# Altium PCB Board_IV-11_Clock.PcbDoc
Units mm, origin at the board's own origin, x right, y up, seen from the top; angles counter-clockwise.
Board outline 137.6 x 59.83 mm, 2 copper layers (Top Layer, Bottom Layer); 58 components, 55 nets, 281 pads, 61 vias.
Unrouted connection lines stored in the file: 6.
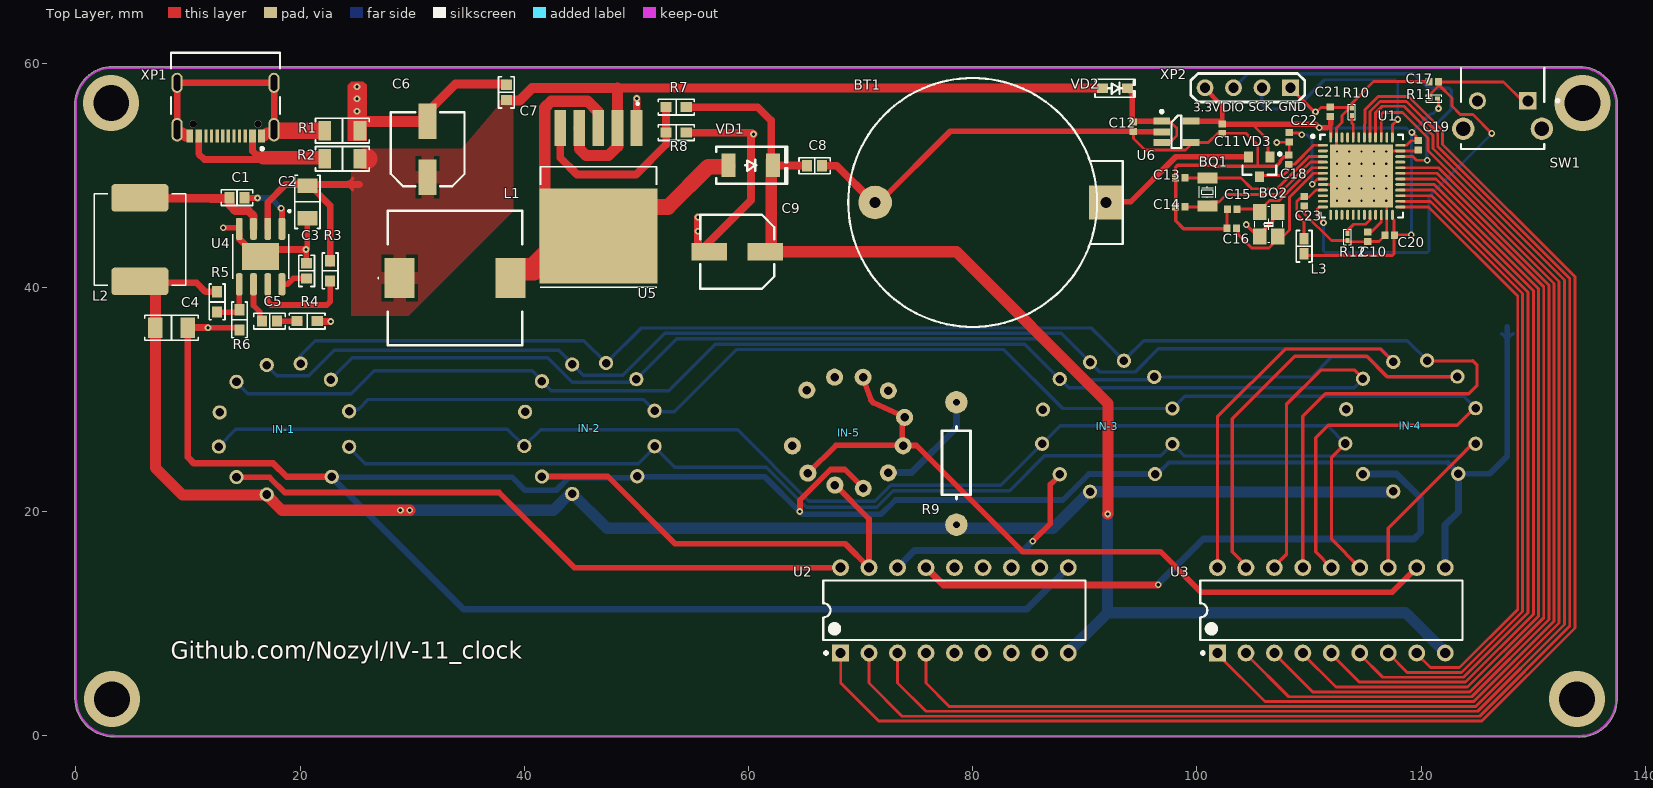
[diagram p0: Top Layer view]
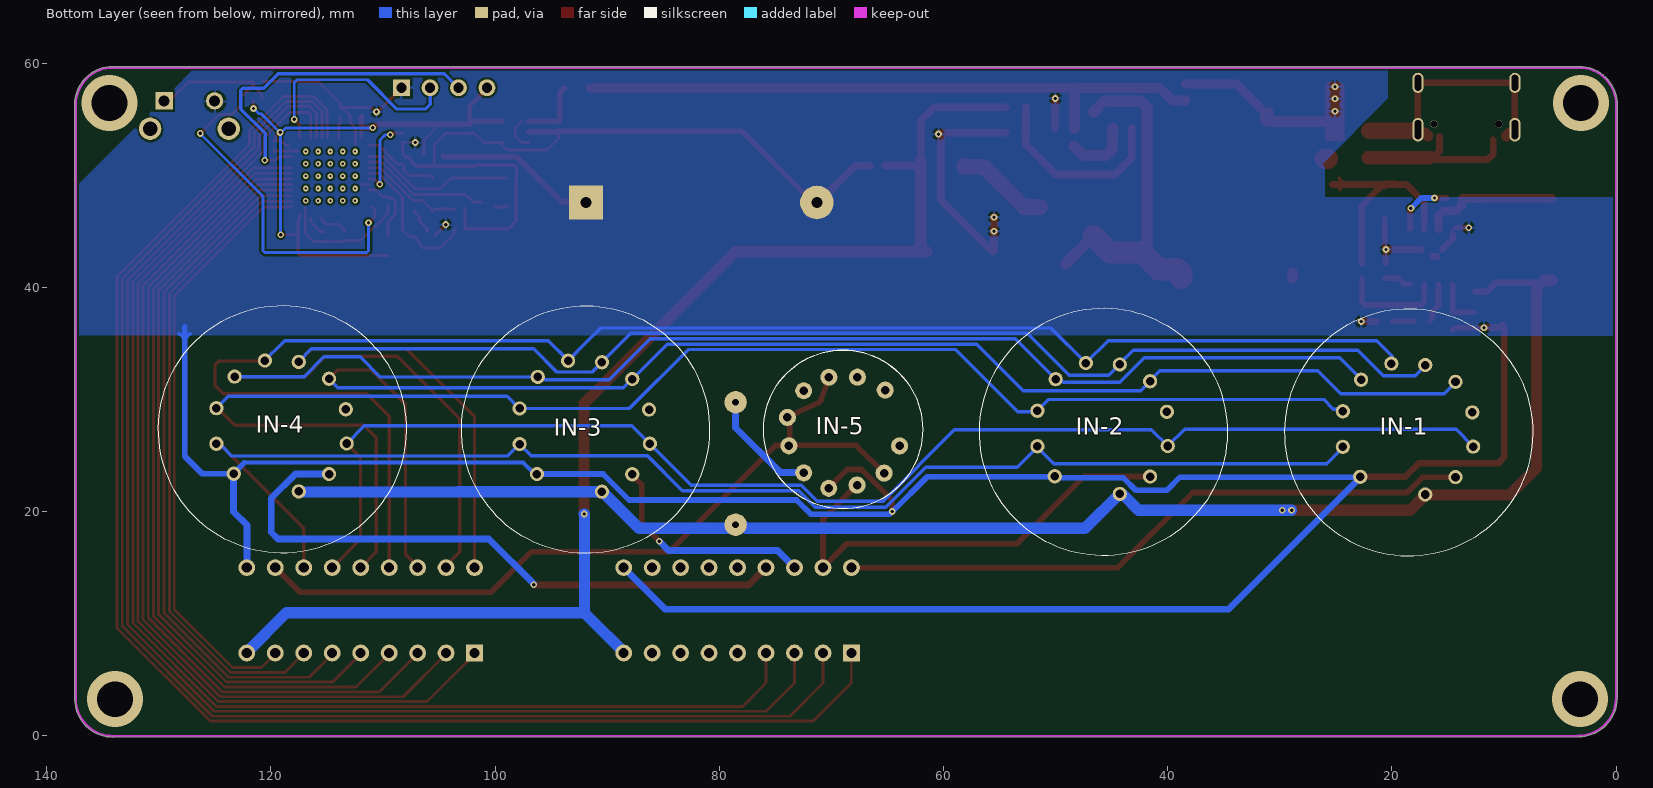
[diagram p1: Bottom Layer view, seen from below]
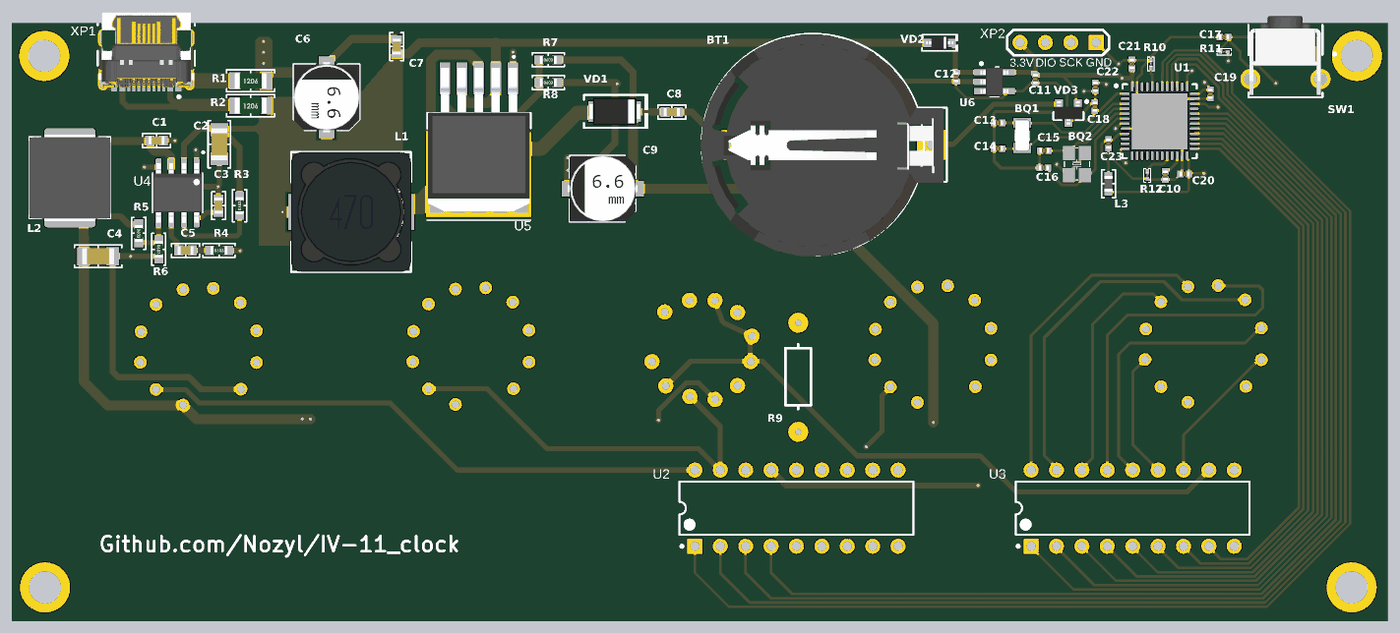
[diagram p2: 3D render of the assembled board from above, using the file's embedded part models]

## Layer stack, top to bottom
Top Solder: solder mask 0.0102, Solder Resist, Dk 3.5
Top Layer: signal copper 0.0356
Dielectric 1: dielectric 0.32, FR-4, Dk 4.8
Bottom Layer: signal copper 0.0356
Bottom Solder: solder mask 0.0102, Solder Resist, Dk 3.5

## Board outline
-0.088,3.309 -0.097,56.299 -0.1,56.325 cw(c3.28,56.318) -0.097,56.469 -0.094,56.524 cw(c3.282,56.318) 3.243,59.7 3.25,59.7 134.125,59.7 cw(c134.117,56.317) 137.5,56.325 137.5,56.316 137.5,3.258 137.5,3.193 cw(c134.118,3.257) 134.118,-0.125 134.085,-0.12 3.375,-0.1 3.327,-0.088 cw(c3.35,3.35)

## Design rules (kind name [scope] priority, off if disabled: settings)
Clearance Clearance_1 [All] p1: gap=0.18 ignorepadtopadclearanceinfootprint=FALSE except(0: Arc-Hole Track-Hole SMDPad-Hole THPad-Hole Via-Hole Fill-Hole Poly-Hole Region-Hole Text-Hole)
ComponentClearance [All] p1: gap=0.2 collisioncheckmode=3 verticalgap=0 showdistances=FALSE donotcheckwithout3dbody=TRUE
PolygonConnect PolygonConnect_2 [All vs IsNamedPolygon('GND_L02_P002')] p1: connectstyle=Relief reliefconductorwidth=0.254 reliefentries=4 polygonreliefangle="90 Angle" airgapwidth=0.254
PolygonConnect PolygonConnect_1 [All vs IsNamedPolygon('GND_L02_P002')] p2: thpad.connectstyle=NoConnect thpad.reliefconductorwidth=0.254 thpad.reliefentries=4 thpad.polygonreliefangle="90 Angle" thpad.airgapwidth=0.254 smdpad.connectstyle=Relief smdpad.reliefconductorwidth=0.254 smdpad.reliefentries=4 smdpad.polygonreliefangle="90 Angle" smdpad.airgapwidth=0.254 via.connectstyle=Relief via.reliefconductorwidth=0.254 via.reliefentries=4 via.polygonreliefangle="90 Angle" via.airgapwidth=0.254
PolygonConnect [All] p3: thpad.connectstyle=Relief thpad.reliefconductorwidth=0.254 thpad.reliefentries=4 thpad.polygonreliefangle="90 Angle" thpad.airgapwidth=0.254 smdpad.connectstyle=Relief smdpad.reliefconductorwidth=1.154 smdpad.reliefentries=4 smdpad.polygonreliefangle="90 Angle" smdpad.airgapwidth=0.254 via.connectstyle=Relief via.reliefconductorwidth=0.254 via.reliefentries=4 via.polygonreliefangle="90 Angle" via.airgapwidth=0.254
RoomDefinition Schemathic_IV-11_Clock [InComponentClass('Schemathic_IV-11_Clock')] p1: confinementstyle=ConfineIn formatcopy=TRUE lockcomponents=FALSE outline -4.95,-67.025 45.85,-67.025 45.85,-41.625 -4.95,-41.625
RoutingVias [All] p1 off: holewidth=0.711 width=1.27 viastyle="Through Hole" minholewidth=0.711 minwidth=1.27 maxholewidth=0.711 maxwidth=1.27
SolderMaskExpansion [All] p1: expansion=0.102 istentingtop=FALSE
Width [All] p1 off: maxlimit=0.254 minlimit=0.254 preferedwidth=0.254
29 further rules are at their usual default settings.

## Components (designator, comment, footprint, x,y, rotation, side; value= is the part's Value field where it differs from the comment)
BQ1 "32khz" KX-327NHT 100.946,48.5 r270 top
BQ2 "25Mhz" "4-SMD No lead" 106.425,45.631 r270 top
BT1 "CR2032" Battery_2032 80,47.575 r90 top value=3V
C1 "10nf" Cap_0603 14.375,48 r0 top
C2 "10uf" Cap_1206_3216 20.65,47.625 r270 top
C3 "100nf" Cap_0603 20.575,41.475 r270 top
C4 "10uf" Cap_1206_3216 8.525,36.4 r180 top
C5 "3.9nf" Cap_0603 17.276,36.991 r0 top
C6 "35v 220uf" "CAP 6.6MM H5.4MM" 31.375,52.325 r90 top
C7 "100nf" Cap_0603 38.4,57.4 r90 top
C8 "100nf" Cap_0603 65.9,50.85 r0 top
C9 "100uf" "CAP 6.6MM H5.4MM" 59,43.175 r180 top value="50v 100uf"
C10 "2.2uF" Cap_0402 115.25,44.5 r270 top
C11 "4.7uf" Cap_0402 102.247,54.159 r270 top
C12 "4.7uf" Cap_0402 94.322,54.334 r270 top
C13 "6pf" Cap_0402 98.525,49.75 r0 top
C14 "6pf" Cap_0402 98.525,47.175 r0 top
C15 "8pf" Cap_0402 103.156,46.975 r0 top
C16 "8pf" Cap_0402 103.1,45.245 r0 top
C17 "100nf" Cap_0402 121.138,58.334 r0 top
C18 "100nf" Cap_0402 108.2,51.4 r270 top
C19 "100nf" Cap_0402 119.75,52.675 r270 top
C20 "100nf" Cap_0402 117.2,44.65 r180 top
C21 "100nf" Cap_0402 111.9,55.654 r270 top
C22 "100nf" Cap_0402 108.25,53.375 r270 top
C23 "100nf" Cap_0402 109.571,47.675 r270 top
IN-1 "IV-11" PCBComponent_1#1 18.475,27.075 r0 top
IN-2 "IV-11" PCBComponent_1#1 45.725,27.125 r0 top
IN-3 "IV-11" PCBComponent_1#1 91.925,27.325 r0 top
IN-4 "IV-11" PCBComponent_1#1 118.975,27.35 r0 top
IN-5 "IV-6" PCBComponent_1#2 69,27.35 r0 top
L1 "470" CDRH127NP 33.822,40.834 r270 top
L2 "100" "3232_8.89 mm" 5.7,44.258 r0 top
L3 "10" "FER 0603" 109.575,43.666 r90 top
R1 "0" Res_1206 23.775,53.975 r0 top
R2 "0" Res_1206 23.775,51.475 r0 top
R3 "100k" RES_0603 22.68,41.471 r90 top value=100K
R4 "6.8k" RES_0603 20.626,36.991 r0 top value=6.8K
R5 "5.1k" RES_0603 12.591,38.7 r270 top value=6.2K
R6 "8.2k" RES_0603 14.591,37.099 r270 top value=8.2K
R7 "11k" RES_0603 53.55,56.075 r0 top value=11K
R8 "33" RES_0603 53.55,53.8 r0 top
R9 "10" DIP 78.55,29.75 r270 top
R10 "10k" Res_0201 113.825,55.654 r270 top
R11 "10k" Res_0201 121.147,56.859 r0 top
R12 "10k" Res_0201 113.45,44.5 r270 top
SW1 "Switch Right Angle" "Button Right Angle" 127.247,56.509 r0 top value=TS-A3PS-130
U1 "STM32F401" STM-UFQFPN48_N 114.7,49.925 r0 top
U2 "TD62783APG" ALEG-DIP-18 78.375,11.19 r90 top
U3 "TD62783APG" ALEG-DIP-18 112,11.19 r90 top
U4 "MP2307DN" SOIC127P600X170-9N 16.475,42.75 r270 top
U5 "XL6009" DPAK170P1435X465-6N 46.605,48.075 r270 top
U6 "XC6219B332MR" SOT-23-5 98.175,53.875 r0 top value=LD2980ABM33TR
VD1 "SS34" SMA_DO214AC 60.2,50.9 r0 top value=10BQ100
VD2 "BAS321" SOD323 92.7,57.77 r0 top value=10BQ100
VD3 "BAT54C" SOT-23-3 105.575,50.75 r270 top
XP1 "USB TYPE_C" FP-USB4105-GF-A-MFG 13.347,57.084 r180 top
XP2 "PLS-4" PLS-4 108.352,57.809 r180 top

## Footprints (in the part's own frame and the unit in brackets; to place one, negate y for a bottom-side part, rotate by r counter-clockwise, add the part's x,y. Pads: shape width x height; smd on the part's side, far side on the other; paste and mask are expansions set on the pad)
"4-SMD No lead" [mm] "SMD Low-Freq Crystal"
  rect 1.4x1.2 smd mask+0.05: 1(-1.1,-0.8) 2(1.1,-0.8) 3(1.1,0.8) 4(-1.1,0.8)
  silkscreen extent -1.6,-1.25 1.6,1.25
"3232_8.89 mm" [mm]
  rrect25% 5.09x2.46 smd paste+0 mask+0.102: 1(0,3.725) 2(0,-3.725)
  silkscreen extent -4.09,-4.09 4.09,4.09, body extent -4.09,-4.32 4.09,4.32, height 4.01
ALEG-DIP-18 [mm] "DIP, 8-Leads, Body 23.35x7.1mm, Pitch 2.54mm"
  rect 1.5x1.5 hole 0.9: 1(-3.81,10.16)
  round 1.5 hole 0.9: 2(-3.81,7.62) 3(-3.81,5.08) 4(-3.81,2.54) 5(-3.81,0) 6(-3.81,-2.54) 7(-3.81,-5.08) 8(-3.81,-7.62) 9(-3.81,-10.16) 10(3.81,-10.16) 11(3.81,-7.62) 12(3.81,-5.08) 13(3.81,-2.54) 14(3.81,0) 15(3.81,2.54) 16(3.81,5.08) 17(3.81,7.62) 18(3.81,10.16)
  silkscreen extent -3.93,-11.7 2.65,11.7, body extent -3.95,-11.67 3.95,11.67, height 5.33
Battery_2032 [mm]
  rect 3x3 hole 1: 1(0,-11.9)
  round 3 hole 1: 2(0,8.7)
  silkscreen extent -11.1,-13.4 11.1,11.1, body extent -11.22,-13.09 11.08,11.21, height 8.5
"Button Right Angle" [mm]
  rect 1.54x1.54 hole 0.99 paste-1000 mask+0: 1(2.283,0.134)
  round 2 hole 1.3 paste-1000 mask+0: 2(3.538,-2.356) 4(-3.472,-2.356)
  round 1.54 hole 0.99 paste-1000 mask+0: 3(-2.217,0.134)
  silkscreen extent -3.67,-4.18 5.06,3.05, body extent -4.6,-4.33 4.6,4.34, height 0.25
"CAP 6.6MM H5.4MM" [mm] "Aluminum Electrolytic Capacitor, Body 6.60x6.60x5.40mm, IPC Low Density"
  rect 3.2x1.6 smd: 1(-2.5,0) 2(2.5,0)
  silkscreen extent -3.3,-3.3 3.3,3.3, body extent -3.5,-3.3 3.5,3.3, height 5.4
Cap_0402 [mm]
  rect 0.62x0.67 smd: 1(-0.425,0.012) 2(0.425,0.012)
  body extent -0.5,-0.24 0.5,0.26, height 0.56
Cap_0603 [mm]
  rect 0.9x1 smd: 1(-0.675,0) 2(0.675,0)
  silkscreen extent -1.4,-0.7 1.4,0.7, body extent -0.8,-0.41 0.8,0.41, height 0.82
Cap_1206_3216 [mm]
  rect 1.3x1.8 smd: 1(-1.45,0) 2(1.45,0)
  silkscreen extent -2.37,-1.12 2.37,1.12, body extent -1.6,-0.81 1.6,0.81, height 1.62
CDRH127NP [mm]
  rect 3.6x2.7 smd: 1(0,-4.95) 2(0,4.95)
  silkscreen extent -6,-6.9 6,6, body extent -6,-5.99 6,6.01, height 7.42
DIP [mm]
  round 2 hole 0.6: 1(0,0) 2(10.922,0)
  silkscreen extent 2.16,-1.27 8.64,1.27, body extent 0.4,-1.1 10.4,1.12, height 2.6
DPAK170P1435X465-6N [mm]
  rect 3.21x1.05 smd: 1(-6.13,3.4) 2(-6.13,1.7) 3(-6.13,0) 4(-6.13,-1.7) 5(-6.13,-3.4)
  rect 8.46x10.53 smd paste-6: 6(3.5,0)
  silkscreen extent -8.4,-5.18 8.05,5.18, body extent -7.18,-5.08 7.18,5.08, height 4.65
"FER 0603" [mm] "Chip Ferrite, 2-Leads, Body 1.60x0.80mm, IPC Medium Density"
  rect 1x0.8 smd: 1(-0.675,0) 2(0.675,0)
  silkscreen extent -1.4,-0.7 1.4,0.7, body extent -0.8,-0.41 0.8,0.41, height 0.82
FP-USB4105-GF-A-MFG [mm]
  rrect100% 1x2.1 hole 1.7 slot 0.6 at 0 deg paste-1000 mask+0: 1(-4.32,3.015) 2(4.32,3.015)
  rrect100% 1x1.8 hole 1.4 slot 0.6 at 0 deg paste-1000 mask+0: 3(-4.32,-1.165) 4(4.32,-1.165)
  rect 0.6x1.15 smd paste+0 mask+0: A1-B12(-3.2,3.59) A4-B9(-2.4,3.59) B1-A12(3.2,3.59) B4-A9(2.4,3.59)
  rect 0.3x1.15 smd paste+0 mask+0: A5(-1.25,3.59) A6(-0.25,3.59) A7(0.25,3.59) A8(1.25,3.59) B5(1.75,3.59) B6(0.75,3.59) B7(-0.75,3.59) B8(-1.75,3.59)
  round 0.65 hole 0.65 unplated paste-1000 mask+0: ""(-2.89,2.515) ""(2.89,2.515)
  silkscreen extent -4.86,-3.84 4.86,4.84, body extent -4.96,-3.94 4.96,4.27, height 0.25
KX-327NHT [mm] "SMD Low-Freq Crystal"
  rect 1x1.8 smd mask+0.1: 1(-1.25,0) 2(1.25,0)
  silkscreen extent -0.5,-0.75 0.5,0.75, body extent -1.6,-0.75 1.6,0.75, height 0.71
PCBComponent_1#1 [mil]
  round 50 hole 30: 1(-57.21,-218.62) 2(-163.51,-157.6) 3(-225.52,-50.31) 4(-222.57,69.77) 5(-163.51,177.05) 6(-57.21,236.1) 7(61.83,241.07) 8(168.18,184.53) 9(232.16,73.7) 10(232.16,-51.3) 11(171.13,-156.61)
PCBComponent_1#2 [mil]
  round 60 hole 30: 1(-149.54,137.06) 2(-52.1,182.53) 3(48.26,182.33) 4(136.77,134.86) 5(194.13,41.28) 6(188.85,-58.41) 7(136.71,-153.37) 8(48.68,-207.67) 9(-50.57,-196.41) 10(-145.77,-154.35) 11(-199.91,-58.88)
PLS-4 [mm]
  rect 1.5x1.5 hole 0.9: 1(0,0)
  round 1.5 hole 0.9: 2(2.54,0) 3(5.08,0) 4(7.62,0)
  silkscreen extent -1.27,-1.27 8.89,1.27, body extent -1.12,-1.12 8.74,1.12, height 8.5
Res_0201 [mm]
  rect 0.44x0.35 smd: 1(-0.325,0) 2(0.325,0)
  silkscreen extent -0.7,-0.33 0.7,0.33, body extent -0.3,-0.15 0.3,0.15, height 0.21
RES_0603 [mm] "Chip Resistor, 2-Leads, Body 1.60x0.80mm, IPC Medium Density"
  rect 1x0.9 smd: 1(-0.9,0) 2(0.9,0)
  silkscreen extent -1.6,-0.7 1.6,0.7, body extent -0.85,-0.4 0.85,0.4, height 0.45
Res_1206 [mm]
  rect 1.15x1.7 smd: 1(-1.575,0) 2(1.575,0)
  silkscreen extent -2.4,-1.1 2.4,1.1, body extent -1.6,-0.78 1.6,0.77, height 0.55
SMA_DO214AC [mm] "Molded Diode, 2-Leads, Body 4.30x2.60mm, IPC Medium Density"
  rect 1.27x2.1 smd: 1(-1.985,0) 2(1.985,0)
  silkscreen extent -3.08,-1.65 3.25,1.65, body extent -2.6,-1.37 2.6,1.37, height 2.4
SOD323 [mm] "SOD, 2-Leads, Body 1.25x2.50mm, IPC Medium Density"
  rect 1x0.83 smd: 1(-1.112,0) 2(1.112,0)
  silkscreen extent -1.78,-0.8 1.78,0.8, body extent -1.36,-0.62 1.36,0.62, height 1.05
SOIC127P600X170-9N [mm]
  rrect50% 1.97x0.6 smd: 1(-2.475,1.905) 2(-2.475,0.635) 3(-2.475,-0.635) 4(-2.475,-1.905) 5(2.475,-1.905) 6(2.475,-0.635) 7(2.475,0.635) 8(2.475,1.905)
  rect 2.41x3.3 smd paste-3: 9(0,0)
  silkscreen extent -4.16,-2.5 2,2.67, body extent -3,-2.45 3,2.45, height 1.7
SOT-23-3 [mm] "SOT23, 3-Leads, Body 2.90x2.40mm, Pitch 0.95mm, IPC Medium Density"
  rect 0.972x0.802 smd: 1(-0.885,0.95) 2(-0.885,-0.95) 3(0.885,0)
  silkscreen extent -1.27,-1.5 0.7,1.95, body extent -1.16,-1.45 1.16,1.45, height 1
SOT-23-5 [mm] "SOT23, 5-Leads, Body 2.90x2.80mm, Pitch 0.95mm, IPC Medium Density"
  rect 1.5x0.62 smd: 1(-1.31,0.95) 2(-1.31,0) 3(-1.31,-0.95) 4(1.31,-0.95) 5(1.31,0.95)
  silkscreen extent -1.43,-1.45 0.43,1.93, body extent -1.4,-1.45 1.4,1.45, height 1
STM-UFQFPN48_N [mm] "QFN, 48-Leads, Body 7.1x7.1mm, Pitch 0.5mm, Thermal Pad 5.6x5.6mm, IPC Medium Density"
  oval 0.9x0.25 smd: 1(-3.45,2.75) 2(-3.45,2.25) 3(-3.45,1.75) 4(-3.45,1.25) 5(-3.45,0.75) 6(-3.45,0.25) 7(-3.45,-0.25) 8(-3.45,-0.75) 9(-3.45,-1.25) 10(-3.45,-1.75) 11(-3.45,-2.25) 12(-3.45,-2.75) 25(3.45,-2.75) 26(3.45,-2.25) 27(3.45,-1.75) 28(3.45,-1.25) 29(3.45,-0.75) 30(3.45,-0.25) 31(3.45,0.25) 32(3.45,0.75) 33(3.45,1.25) 34(3.45,1.75) 35(3.45,2.25) 36(3.45,2.75)
  oval 0.25x0.9 smd: 13(-2.75,-3.45) 14(-2.25,-3.45) 15(-1.75,-3.45) 16(-1.25,-3.45) 17(-0.75,-3.45) 18(-0.25,-3.45) 19(0.25,-3.45) 20(0.75,-3.45) 21(1.25,-3.45) 22(1.75,-3.45) 23(2.25,-3.45) 24(2.75,-3.45) 37(2.75,3.45) 38(2.25,3.45) 39(1.75,3.45) 40(1.25,3.45) 41(0.75,3.45) 42(0.25,3.45) 43(-0.25,3.45) 44(-0.75,3.45) 45(-1.25,3.45) 46(-1.75,3.45) 47(-2.25,3.45) 48(-2.75,3.45)
  rect 5.6x5.6 smd paste+0 mask+0.102: 49(0,0)
  silkscreen extent -4.47,-3.7 3.7,3.7, body extent -3.55,-3.55 3.55,3.55, height 0.6

## Part data
BQ1: library part XTAL-2Pin, "Часовой кварц", Package=DIP
BQ2: library part XTAL-4Pin_1, "Кварцевый резонатор", Package=DIP
BT1: library part Battery_2Pin, "Держатель  для CR2032", Name="держатель для CR2032"
C1 C2 C3 C4 C5 C7 C8 C10 C11 C12 C13 C14 C15 C16 C17 C18 C19 C20 C21 C22 C23: library part Capacitor, "Конденсатор", Package=0805
C6 C9: library part Capacitor_Polar, "Конденсатор эл-лит", Package=DIP
IN-1 IN-2 IN-3 IN-4: "Вакуумный индикатор"
IN-5: library part IV-11, "Вакуумный индикатор"
L1 L2 L3: library part Drossel, "Дроссель"
R1 R2 R3 R4 R5 R6 R7 R8 R9 R10 R11 R12: library part Resistor, "Резистор", Package=0805
SW1: library part Button, "Кнопка", Packege=DIP
U1: library part CMP-0243-00119-2, "ARM Cortex-M4 32-bit MCU+FPU, 105 DMIPS, 256 kB Flash, 64 kB Internal RAM, 36 I/Os, 48-pin UFQFPN, -40 to 85 degC, Tray", I/Os (High Current)=36, Manufacturer=STMicroelectronics, Operating Frequency(F) (Processor speed) (MHz)=84, PartNumber=STM32F401CCU6, Supply Voltage(Vcc) max (V)=3.6, Supply Voltage(Vcc) min (V)=1.8, ComponentLink1Description="Manufacturer URL", ComponentLink1URL=http://www.st.com/web/en/home.html, ComponentLink2Description=Datasheet, ComponentLink2URL=http://www.st.com/st-web-ui/static/active/en/resource/technical/document/data_brief/DM00071938.pdf, ComponentLink3Description="Package Specification", ComponentLink3URL=http://www.st.com/st-web-ui/static/active/en/resource/technical/document/data_brief/DM00071938.pdf, Core="ARM Cortex-M4", DatasheetVersion="Rev. 1", FLASH Size (Prog) (kB)=256, Internal RAM Size (kB)=64, Mounting Technology="Surface Mount", PackageDescription="48-Pin Ultra Thin Fine Pitch Quad Flat No-Lead, 7 x 7 x 0.6 mm Body, 0.5 mm Pitch, Exposed Pad", PackageReference=UFQFPN48, PackageVersion="Rev. 1, 04/2013", Packing=Tray
U2 U3: library part CMP-2000-07346-1, "8-Channel Source Driver, 15 V Input, -20 to 85 degC, 18-Pin DIP, RoHS, Tube", Current - Output / Channel=120mA, Current - Peak Output=500mA, Manufacturer="Allegro Microsystems", On-State Resistance=-, Operating Temperature=-20°C~85°C, Package / Case="18-DIP(0.300\",7.62mm)", Package Description="18-Pin Double In-line Package, Body 22.86 x 6.605 mm, Pitch 2.54 mm", Package Reference=DIP-18, Standard Package=21, Supplier Device Package=18-DIP, Voltage - Supply=25V, Category=IntegratedCircuits(ICs), Datasheet URL=https://datasheet.ciiva.com/19456/1762681-19456617.pdf, Family=PMIC-MOSFET,BridgeDrivers-InternalSwitch, Input Type=Non-Inverting, Manufacturer URL=http://www.allegromicro.com/, Mounting Technology=ThroughHole, Mounting Type=ThroughHole, Number of Outputs=8, Other Names=620-1120, Packaging=Tube, Product Change Notification=UDN298xAx-TLTBNotice30/Apr/2012, Series=-, Type=HighSide
U4: library part MP2307DN-LF-Z, "Buck Switching Regulator IC Positive Adjustable 0.925V 1 Output 3A 8-SOIC (0.154, 3.90mm Width) Exposed Pad", Package="SOIC-8 Monolithic Power", Availability="In Stock", Check_prices=https://www.snapeda.com/parts/MP2307DN-LF-Z/Monolithic+Power+Systems+Inc./view-part/?ref=eda, MF="Monolithic Power", MP=MP2307DN-LF-Z, Price=None, Purchase-URL=https://pricing.snapeda.com/search/part/MP2307DN-LF-Z/?ref=eda, SnapEDA_Link=https://www.snapeda.com/parts/MP2307DN-LF-Z/Monolithic+Power+Systems+Inc./view-part/?ref=snap
U5: "The XL6009 regulator is a wide input range, current mode, DC/DC converter which is capable of generating either positive or negative output voltages.", Package="TO-263-5L XLSEMI", Availability="Not in stock", Check_prices=https://www.snapeda.com/parts/XL6009/XLSEMI/view-part/?ref=eda, MF=XLSEMI, MP=XL6009, Price=None, SnapEDA_Link=https://www.snapeda.com/parts/XL6009/XLSEMI/view-part/?ref=snap
U6: library part LD2980ABM33TR, "LDO", Package=T05A, Name=XC6219B332MR
VD1 VD2: library part "Diode Shotki", "Диод Шотки"
VD3: library part Diode_Double, "Диод", Name=BAT54C
XP1: library part CMP-245163-000001-1, "CONN RCPT USB2.0 TYPEC 5A", Current Rating=5/6.25/1.25/0.25A, Manufacturer=GCT, Manufacturer Part Number=USB4105-GF-A, Package=0, Temperature="-40°C to +85°C", Temperature Range High=+85°C, Temperature Range Low=-40°C, Voltage Rating=20V, Automotive=No, Category=Conn, ComponentLink2Description=Datasheet, ComponentLink2URL=https://gct.co/files/drawings/usb4105.pdf, Conn Orientation="Right Angle", Contact Material=Gold,Nickel, Device Class L1=Connectors, Device Class L2="USB Connectors", Device Class L3=unset, Digikey Description="CONN RCPT USB2.0 TYPEC 5A", Height=3.46mm, Is Female=yes, Lead Free=Yes, Number Of Contacts=16, Octopart=https://octopart.com/usb4105-gf-a-gct-106627878, RoHS=TRUE, Usb Standard="USB 2.0"
XP2: library part XP4, "Connector"

## Free pads (board coordinates)
  round 1.524 hole 3.2: 12(3.15,56.45) 12(3.231,3.255) 12(133.906,3.255) 12(134.431,56.455)

## Via types
v1: diameter 0.6, hole 0.3, Top Layer to Bottom Layer, tented both sides, 32 vias
v2: diameter 0.5, hole 0.2, Top Layer to Bottom Layer, 25 vias
v3: diameter 5, hole 3.2, Top Layer to Bottom Layer, 4 vias

## Nets (pads, with @x,y where several pads share a name; then routed paths per layer and width w, separated by ;. In a path a pad name is that pad's centre, name@x,y a point inside that pad or via, vN(x,y) a via of type N, cw(c..) or ccw(c..) an arc to the next point about the centre after c; other vN are vias at no path point)
1.5V: C4.2 IN-1.1 IN-2.1 IN-3.1 IN-4.1 L2.2 R5.1 R9.2 | length 141.2
  Top Layer w0.6: L2.2@7.09,40.4 10.775,40.4 11.575,39.6 R5.1
  Top Layer w1: L2.2@5.7,40.639 6.383,40.639 7.09,39.932 7.09,38.382 7.097,38.375 7.097,37.689 ; 7.097,37.682 7.097,36.482 7.097,23.878 9.5,21.475 17.025,21.475 18.391,20.109 v1(28.947,20.109) v1(29.772,20.109)
  Bottom Layer w0.3: R9.2@77.6,18.846 ccw(c77.565,19.552) R9.2@78.204,19.248 ; R9.2@78.871,19.475 ccw(c79.577,19.51) R9.2@79.273,18.871
  Bottom Layer w1: v1(28.947,20.109) v1(29.772,20.109) 42.584,20.109 43.997,21.522 44.219,21.522 IN-2.1@44.271,21.574 ; IN-2.1@44.3,21.575 47.366,18.509 72.534,18.509 72.55,18.525 72.566,18.509 77.6,18.509 77.728,18.637 78.359,18.637 R9.2 ; R9.2@78.549,18.509 79.273,18.509 87.159,18.509 90.418,21.768 90.486,21.768 103.289,21.768 103.307,21.75 IN-4.1@117.475,21.75
3.3V: C11.1 C19.1 C20.1 C21.2 L3.1 R11.2 U1.24 U1.36 U1.48 U6.5 VD3.1 XP2.4 | length 59.1
  Top Layer w0.254: 105,54.5 106.35,53.15 106.35,51.925 VD3.1@106.525,51.75 ; L3.1@109.575,42.84 117.451,42.84 117.6,42.989 C20.1@117.6,44.65 ; 111.601,54.229 111.95,54.579 ; U1.24 117.45,46.154 117.6,46.004 C20.1@117.6,44.65 ; U1.36@118.473,52.677 118.702,52.677 119.1,53.075 119.738,53.075 119.554,53.258 119.554,53.501 119.233,53.823 v1(119.187,53.823) ; v1(119.125,44.7) 117.65,44.7 C20.1@117.6,44.65 ; v1(121.559,55.952) 121.559,56.655
  Top Layer w0.3: C11.1@102.247,54.559 C11.1@102.272,54.584 ; U1.48 111.95,54.579
  Top Layer w0.4: XP2.4@100.697,57.759 102.272,56.184 C11.1@102.272,54.584
  Top Layer w0.5: U6.5@99.35,54.825 101.941,54.825 102.196,54.569 102.237,54.569 C11.1@102.237,54.549 ; C11.1@102.247,54.559 102.256,54.55 105,54.55 106.675,54.55 ; 106.737,54.55 110.582,54.55 110.903,54.229 v1(110.925,54.229) 111.601,54.229 ; C21.2 111.95,55.192 111.95,54.579
  Bottom Layer w0.254: v1(110.925,54.229) 118.687,54.229 v1@119.094,53.823 ; v1(119.125,44.7) 119.156,44.731 119.156,53.792 v1@119.125,53.823 ; v1(119.187,53.823) 119.209,53.823 120.871,55.486 121.062,55.486 121.528,55.952 v1(121.559,55.952)
5V: C2.1 C6.1 C7.1 L1.1 R2.2 R3.2 U4.2 U5.2 U5.4 VD2.1 | length 84.3
  Top Layer w0.3: 24.025,49.046 cw(c24.081,48.341) 24.675,48.725 ; 24.097,49.322 ccw(c24.061,50.029) 24.7,49.725
  Top Layer w0.6: U4.2 17.11,47.585 18.7,49.175 C2.1@19.775,49.175 ; C2.1 20.758,49.183 24.081,49.183 25.3,49.183 ; C2.1@20.9,49.075 22.675,47.3 R3.2@22.675,42.125
  Top Layer w0.7: C2.1@19.775,49.2 20.525,49.2 C2.1
  Top Layer w0.8: 48.45,57.781 91.207,57.781 91.223,57.765 VD2.1@91.556,57.765
  Top Layer w0.9: C7.1@38.4,56.675 39.6,56.675 40.706,57.781 48.305,57.781 48.45,57.781
  Top Layer w1: L1.1 L1.1@28.872,41.284 ; U5.4 44.93,54.18 44.93,52.345 45.516,51.759 47.447,51.759 ; 47.508,51.759 48.348,52.599 ; U5.2 48.305,57.781
  Top Layer w1.8: R2.2@25.7,51.475 26,51.475
45V: C8.1 C9.1 R7.2 U2.9 U3.9 VD1.2 | length 115.4
  Top Layer w0: VD1.2@62.065,51.3 62.181,51.184 VD1.2@62.181,50.894
  Top Layer w0.7: R7.2@54.4,56.075 60.825,56.075 62.025,54.875 62.025,51.34 VD1.2@62.04,51.325 ; VD1.2@62.065,51.3 62.065,51.236 62.466,50.834 62.466,50.872 65.203,50.872 C8.1
  Top Layer w1: C9.1 62.173,43.175 C9.1@62.349,43.351 ; VD1.2@62.04,51.325 62.025,51.31 62.025,50.834 62.025,43.675 C9.1@62.349,43.351 ; v1(92.05,19.775) 92.075,19.8 92.075,29.65 78.55,43.175 62.55,43.175 62.441,43.286 62.363,43.365 C9.1@62.349,43.351
  Bottom Layer w1: U2.9@88.475,7.4 91.625,10.55 92.024,10.949 ; v1(92.05,19.775) 92.024,19.749 92.024,10.949 ; U3.9@122.175,7.4 118.6,10.975 92.024,10.975 92.024,10.949
A: IN-1.6 IN-2.6 IN-3.6 IN-4.6 U3.18 | length 139.4
  Top Layer w0.3: U3.18 101.84,28.465 107.875,34.5 116.4,34.5 IN-4.6@117.6,33.3
  Bottom Layer w0.3: IN-1.6@16.965,33.085 17.925,32.125 20.775,32.125 23.047,34.397 43.078,34.397 IN-2.6@44.311,33.164 ; IN-2.6@44.271,33.124 45.245,32.15 48.775,32.15 52.52,35.895 87.905,35.895 90.484,33.316 91.35,32.45 94.487,32.45 96.547,34.509 116.391,34.509 IN-4.6@117.525,33.375
B: IN-1.5 IN-2.5 IN-3.5 IN-4.5 U3.16 | length 130
  Top Layer w0.3: U3.16 106.92,15.121 108,16.201 108,29.575 111.05,32.625 114.075,32.625 IN-4.5@114.85,31.85
  Bottom Layer w0.3: IN-1.5@14.275,31.575 15.325,30.525 24.575,30.525 26.597,32.547 40.728,32.547 IN-2.5@41.611,31.664 ; IN-2.5@41.571,31.624 42.42,30.775 52.887,30.775 57.047,34.935 84.646,34.935 87.781,31.8 87.804,31.8 88.561,31.044 114.037,31.044 IN-4.5@115.036,32.042
BUT: C17.2 R11.1 SW1.1 U1.12 | length 43.5
  Top Layer w0.254: U1.12@110.927,47.175 110.899,47.175 110.75,47.026 110.75,46.275 v1@111.275,45.75 ; R11.1@120.747,56.861 120.843,56.957 120.843,57.243 121.563,57.963 C17.2 ; C17.2@121.625,58.025 122.75,56.9 122.75,56.175 123.5,55.425 124.625,55.425 v1@126.316,53.734 ; C17.2@121.722,58.334 127.372,58.334 SW1.1@129.147,56.559 ; v1(126.322,53.734) v1@126.316,53.734 ; v1@126.325,53.725 v1@126.316,53.734
  Bottom Layer w0.254: v1(111.297,45.759) 111.297,43.258 111.445,43.109 120.573,43.109 120.722,43.258 120.722,48.134 v1(126.322,53.734)
C: IN-1.3 IN-2.3 IN-3.3 IN-4.3 U3.13 | length 121.1
  Top Layer w0.3: IN-4.3@113.225,26.05 112.02,24.845 112.02,17.52 U3.13
  Bottom Layer w0.3: IN-1.3@12.721,25.799 14.272,27.35 38.495,27.35 39.996,25.849 41.447,27.3 59.025,27.3 65.391,20.934 71.277,20.934 72.677,22.334 82.502,22.334 86.211,26.043 87.817,27.65 111.679,27.65 IN-4.3@113.261,26.069
CATH1: U1.32 U3.1 | length 82.9
  Top Layer w0.254: U3.1@101.825,7.3 106.08,3.045 124.701,3.045 131.875,10.219 131.875,40.353 121.553,50.675 U1.32
CATH2: U1.31 U3.2 | length 78.7
  Top Layer w0.254: U3.2@104.375,7.3 108.196,3.479 124.521,3.479 131.425,10.383 131.425,40.189 121.439,50.175 U1.31
CATH3: U1.30 U3.3 | length 74.5
  Top Layer w0.254: U3.3@106.95,7.3 110.337,3.913 124.342,3.913 130.948,10.52 130.948,40.052 121.325,49.675 U1.30
CATH4: U1.29 U3.4 | length 70.3
  Top Layer w0.254: U3.4@109.45,7.3 112.403,4.347 124.162,4.347 130.475,10.66 130.475,39.875 121.175,49.175 U1.29
CATH5: U1.28 U3.5 | length 66
  Top Layer w0.254: U3.5@112,7.275 114.494,4.781 123.982,4.781 130.041,10.84 130.041,39.695 121.061,48.675 U1.28
CATH6: U1.27 U3.6 | length 61.9
  Top Layer w0.254: U3.6@114.5,7.3 116.585,5.215 123.802,5.215 129.555,10.967 129.555,39.568 120.947,48.175 U1.27
CATH7: U1.26 U3.7 | length 57.6
  Top Layer w0.254: U3.7@117.1,7.325 118.776,5.649 123.623,5.649 129.06,11.086 129.06,39.449 120.836,47.673 U1.26 U1.26
CATH8: U1.25 U3.8 | length 53.4
  Top Layer w0.254: U1.25 120.675,47.175 128.626,39.224 128.626,11.266 123.443,6.083 120.842,6.083 U3.8@119.625,7.3
D: IN-1.10 IN-2.10 IN-3.10 IN-4.10 U3.12 | length 121.7
  Top Layer w0.3: U3.12 117.08,18.5 124.623,26.044 IN-4.10@124.886,26.044
  Bottom Layer w0.3: IN-1.10@24.325,25.75 25.8,24.275 50.175,24.275 IN-2.10@51.625,25.725 ; IN-2.10@51.625,25.75 53.425,23.95 61.603,23.95 65.169,20.384 71.434,20.384 72.904,21.854 83.288,21.854 86.409,24.975 96.792,24.975 IN-3.10@97.836,26.019 ; IN-3.10@97.8,25.95 97.904,25.95 98.904,24.95 123.5,24.95 124.272,25.722 124.302,25.722 124.623,26.044 IN-4.10@124.886,26.044
DP: IN-5.3 IN-5.5 IN-5.6 IN-5.10 U3.11 | length 69.7
  Top Layer w0.5: IN-5.10@65.372,23.484 67.797,25.909 IN-5.6@73.797,25.909 ; IN-5.3@70.222,31.909 70.934,29.971 70.972,29.868 71.05,29.79 71.113,29.727 IN-5.5@73.926,28.427 ; IN-5.5@73.912,28.397 73.912,28.103 73.725,27.916 73.725,26.339 73.835,26.23 73.855,26.23 73.855,26.031 73.809,25.931 73.792,25.894 74.981,25.894 84.45,16.425 96.75,16.425 100.375,12.8 117.42,12.8 U3.11
E: IN-1.9 IN-2.9 IN-3.9 IN-4.9 U3.14 | length 134.7
  Top Layer w0.3: U3.14 110.6,16.4 110.6,26.575 111.725,27.7 123.25,27.7 IN-4.9@124.888,29.338
  Bottom Layer w0.3: IN-1.9@24.325,28.95 24.511,29.136 25.223,29.136 26.087,30 50.625,30 51.725,28.9 53.362,28.9 58.917,34.455 82.776,34.455 88.038,29.194 97.836,29.194 98.942,30.3 123.8,30.3 IN-4.9@125.055,29.045
F: IN-1.8 IN-2.8 IN-3.8 IN-4.8 U3.17 | length 143.9
  Top Layer w0.3: U3.17 104.38,15.221 103.175,16.426 103.175,28.275 108.75,33.85 115.15,33.85 116.966,32.034 IN-4.8@123.261,32.034
  Bottom Layer w0.3: IN-1.8@22.7,31.775 24.634,33.709 42.097,33.709 44.256,31.55 49.336,31.55 49.413,31.626 49.811,31.626 IN-2.8 ; IN-2.8@49.996,31.814 53.597,35.415 86.16,35.415 89.825,31.75 95.55,31.75 95.623,31.823 96.025,31.823 IN-3.8@96.211,32.009 ; IN-3.8@96.225,32 110.237,32 112.047,33.809 115.272,33.809 117.048,32.034 IN-4.8@123.261,32.034
G: IN-1.7 IN-2.7 IN-3.7 IN-4.7 U3.15 | length 143.5
  Top Layer w0.3: U3.15 109.46,28.51 111.475,30.525 124.275,30.525 125,31.25 125,33.05 124.6,33.45 ; IN-4.7@120.539,33.486 120.6,33.425 124.599,33.425
  Bottom Layer w0.3: IN-1.7@20,33.225 20,33.888 21.337,35.225 45.32,35.225 47.291,33.254 50.413,36.375 90.6,36.375 91.725,35.25 93.5,33.475 95.275,35.25 118.775,35.25 IN-4.7@120.768,33.257
GND: BQ2.2 BQ2.4 BT1.2 C2.2 C3.1 C4.1 C6.2 C7.2 C8.2 C9.2 C10.2 C11.2 C12.2 C13.1 C14.1 C15.1 C16.1 C17.1 C18.1 C19.2 C20.2 C21.1 C22.2 C23.2 IN-1.11 IN-2.11 IN-3.11 IN-4.11 IN-5.8 R1.2 R4.2 R6.2 R8.2 R10.1 R12.2 SW1.3 U1.8 U1.23 U1.35 U1.47 U1.49 U2.10 U3.10 U4.4 U4.9 U5.1 U6.2 U6.4 XP2.1 | length 406.8
  Top Layer w0: C12.2@94.322,53.934 94.383,53.873 C12.2@94.51,53.873
  Top Layer w0.254: C12.2@94.322,53.934 C12.2@94.447,53.809 ; C12.2 94.335,53.809 94.335,53.291 95.366,52.259 98.984,52.259 U6.4@99.575,52.85 ; U6.4@99.25,52.925 99.575,52.925 101.025,52.925 101.875,53.775 102.114,53.775 C11.2@102.25,53.775 ; C11.2@102.25,53.75 104.4,53.75 105.274,52.876 ; C16.1@102.7,45.25 102.7,46.957 C15.1 ; 105.285,52.888 105.434,52.739 105.434,50.949 ; v1(107.13,52.925) 107.155,52.95 108.225,52.95 108.25,52.975 108.25,51.863 C18.1 ; C23.2@109.571,47.275 109.571,46.604 112,44.175 R12.2 ; v1(110.582,55.654) 110.676,55.654 111.072,56.05 R10.1@113.674,56.05 ; U1.8 111.886,49.175 ; 112.45,52.725 112.45,54.204 112.95,54.704 112.95,55.33 R10.1@113.67,56.05 ; R12.2@113.425,44.225 113.45,44.25 113.625,44.075 C10.2 115.284,44.097 116.247,44.097 116.933,44.783 116.933,45.034 116.942,45.043 U1.23@116.942,46.467 ; R10.1@113.825,56.054 113.825,56.409 115.775,58.359 C17.1@120.747,58.359 ; U1.23 116.95,47.12 ; 117.5,52.175 U1.35 118.152,52.177 119.69,52.177 C19.2
  Top Layer w0.3: R8.2@54.4,53.8 R8.2 ; C16.1@102.7,45.245 98.81,45.245 98.125,45.93 98.125,47.175 98.125,49.737 C13.1 98.1,50.724 98.276,50.9 101.774,50.9 101.855,50.819 105.353,50.819 105.434,50.9 105.515,50.819 107.063,50.819 107.427,51.183 107.427,51.301 107.791,51.665 108.052,51.665 C18.1 ; v1(104.4,45.6) BQ2.2@105.388,44.613 ; BQ2.2@106.072,44.981 106.072,45.222 106.772,45.922 106.772,46.281 BQ2.4@107.222,46.731 ; XP2.1@108.347,57.809 110.522,55.634 v1@110.572,55.634
  Top Layer w0.5: v1(11.775,36.4) 14.391,36.4 R6.2@14.591,36.2 ; v1(13.15,45.325) U4.4@14.35,45.325 ; C3.1 20.544,42.181 20.544,43.356 v1(20.525,43.375) 20.525,43.402 20.65,43.527 C2.2 ; v1@22.706,36.969 v1(22.725,36.95) ; R1.2@25.032,53.732 R1.2@25.05,53.975 ; C9.2@55.45,43.175 C9.2@55.499,43.224 ; v1@60.298,53.8 60.423,53.675 v1(60.45,53.675) ; v1(64.575,20) 64.594,20.019 64.594,21.019 67.325,23.75 68.6,23.75 IN-5.8@70.175,22.175 ; BT1.2@71.438,47.575 71.65,47.575 77.999,53.924 94.312,53.924 94.322,53.934 94.332,53.924 94.498,53.924 94.548,53.875 U6.2@97,53.875
  Top Layer w0.6: C4.1 9.975,24.85 10.525,24.3 17.606,24.3 18.806,23.1 IN-1.11@22.775,23.1 ; C4.1@10.075,36.647 10.297,36.425 11.75,36.425 v1(11.775,36.4) ; U4.4@14.575,44.775 14.575,44.3 U4.9@15.512,43.363 ; U4.9@15.93,42.75 U4.9@16.375,42.75 ; U4.9@17.4,43.375 v1(20.525,43.375) ; R4.2@21.375,36.95 v1(22.725,36.95)
  Top Layer w0.7: U5.1@50.033,54.204 v1(50.033,56.851) ; R8.2 60.225,53.8 v1@60.298,53.8 ; C9.2@55.499,43.224 v1(55.499,45.017) v1(55.499,46.267) ; C9.2@55.675,43.225 60.225,47.775 60.225,53.45 v1(60.45,53.675) ; C8.2 67.875,50.85 71.15,47.575 BT1.2@71.438,47.575
  Top Layer w0.8: R1.2@25.075,54 25.075,54.362 25.175,54.462 25.537,54.462 R1.2@25.875,54.8 ; C6.2@30.975,54.8 30.975,54.825 C6.2@30.975,55.65 ; C6.2 31.375,55.65 31.4,55.65 31.775,56.025 31.775,56.05 33.875,58.15 38.375,58.15 C7.2@38.4,58.125
  Top Layer w1: R1.2@25.875,54.8 C6.2@30.975,54.8
  Bottom Layer w0.3: 127.198,35.853 cw(c126.893,35.214) 127.6,35.25 ; 127.775,35.325 cw(c128.471,35.197) 128.254,35.87
  Bottom Layer w0.4: IN-3.11@96.482,23.343 97.514,24.375 122.37,24.375 122.375,24.37
  Bottom Layer w0.5: IN-1.11@22.775,23.1 IN-1.11@23.125,22.75 ; IN-1.11@22.806,23.069 38.906,23.069 40.075,21.9 42.85,21.9 43.95,23 50,23 50.1,23.1 61.452,23.1 v1@64.552,20 ; v1(64.575,20) 64.602,20 64.843,19.759 71.834,19.759 73.109,21.034 85.697,21.034 88.047,21.034 90.362,23.35 IN-3.11@96.124,23.35 ; IN-3.11@96.286,23.343 IN-3.11@96.482,23.343 ; 122.375,24.37 123.37,23.375 IN-4.11@123.375,23.375 ; IN-4.11@123.35,23.375 126.137,23.375 127.697,24.934 127.697,29.284 127.697,36.5
  Bottom Layer w0.6: IN-1.11@22.806,23.069 23.125,22.75 34.6,11.275 84.81,11.275 U2.10 ; U3.10@122.15,15.075 122.15,18.8 123.336,19.986 IN-4.11@123.336,23.369
  other v1: 25.072,55.709 25.072,56.834 25.072,57.909
ISO5V: R2.1 XP1.A4-B9 XP1.B4-A9 | length 15
  Top Layer w0.6: XP1.B4-A9@10.947,53.166 10.947,51.909 11.456,51.4 16.775,51.4 ; XP1.A4-B9@15.747,53.45 15.747,53.044 15.75,53.04 15.75,52.151 16.101,51.8 16.623,51.8
  Top Layer w1.2: 16.718,51.55 R2.1@22.125,51.55
ISOGND: R1.1 XP1.1 XP1.2 XP1.3 XP1.4 XP1.A1-B12 XP1.B1-A12 | length 22.9
  Top Layer w0.6: XP1.2@9.508,53.767 9.458,53.767 9.299,53.926 9.17,53.926 XP1.2 XP1.4 XP1.3 17.7,58.216 17.7,54.675 17.667,54.642 XP1.1
  Top Layer w1: XP1.2@9.508,53.767 9.781,53.494 ; XP1.A1-B12@16.769,53.494 17.044,53.769 XP1.1@17.482,53.769
  Top Layer w1.5: XP1.1@17.917,53.975 R1.1@22,53.975
NetBQ1_1: BQ1.1 C13.2 U1.3 | length 13.9
  Top Layer w0.254: C13.2 BQ1.1@100.933,49.762 ; BQ1.1 103.95,49.75 104.9,48.8 107.158,48.8 110.033,51.675 U1.3
NetBQ1_2: BQ1.2 C14.2 U1.4 | length 12.9
  Top Layer w0.254: C14.2@98.925,47.175 C14.2@99.058,47.308 ; C14.2@98.975,47.175 BQ1.2@100.05,47.175 ; BQ1.2@101.178,47.482 101.319,47.623 101.973,47.623 102.65,48.3 107.272,48.3 110.147,51.175 U1.4
NetBQ2_1: BQ2.1 C15.2 U1.5 | length 9.5
  Top Layer w0.254: C15.2@103.581,46.976 103.764,46.978 103.77,46.978 105.242,46.999 105.347,46.999 105.421,46.927 105.541,46.81 105.622,46.731 105.622,46.893 105.774,47.045 106.494,47.765 107.351,47.765 110.261,50.675 U1.5
NetBQ2_3: BQ2.3 C16.2 U1.6 | length 13.2
  Top Layer w0.254: C16.2@103.5,45.245 103.681,45.064 103.681,44.738 104.895,43.524 106.429,43.524 106.749,43.844 106.749,44.058 107.222,44.531 107.681,44.531 108.272,45.122 108.272,48.034 110.412,50.175 U1.6
NetC1_1: C1.1 L2.1 U4.3 | length 12.4
  Top Layer w0.75: 12.044,47.944 12.05,47.95 ; C1.1@13.717,47.944 13.775,47.886 13.775,47.264 14.214,46.825 15.401,46.825 15.84,46.386 U4.3
  Top Layer w0.8: L2.1@5.7,47.878 5.772,47.95 12.05,47.95 ; 12.044,47.944 C1.1@13.717,47.944
NetC1_2: C1.2 U4.1 | length 5.4
  Top Layer w0.5: C1.2@15.102,47.975 v1(16.2,47.975) ; v1(18.3,47.05) 18.3,47.023 18.38,46.943 U4.1
  Bottom Layer w0.5: v1(16.2,47.975) 17.375,47.975 v1(18.3,47.05)
NetC3_2: C3.2 U4.8 | length 2.4
  Top Layer w0.5: U4.8@18.375,40.275 18.875,40.275 19.4,40.8 20.55,40.8 C3.2
NetC5_1: C5.1 U4.6 | length 3.5
  Top Layer w0.5: U4.6 15.84,38.385 16.412,37.813 16.412,37.216 C5.1@16.583,37.046
NetC5_2: C5.2 R4.1 | length 2
  Top Layer w0.5: C5.2@18.001,36.991 R4.1@19.959,36.991
NetC10_1: C10.1 U1.22 | length 1.9
  Top Layer w0.254: C10.1 115.333,44.996 115.602,44.996 116.448,45.842 U1.22@116.448,46.152
NetC12_1: C12.1 U6.1 U6.3 VD2.2 | length 8.9
  Top Layer w0.22: U6.1@97.6,54.825 98.2,54.225 98.2,53.515 U6.3@97.61,52.925
  Top Layer w0.254: U6.3@97,52.925 U6.3@97.61,52.925
  Top Layer w0.5: VD2.2 93.898,57.77 94.063,57.605 94.063,57.499 94.249,57.312 94.249,54.819 94.309,54.759 C12.1 ; C12.1@94.412,54.825 U6.1@97,54.825
NetC23_1: C23.1 L3.2 U1.9 | length 6.2
  Top Layer w0.254: C23.1@109.475,48.075 109.475,47.979 109.438,47.942 109.188,47.942 108.908,47.662 108.908,46.517 109.575,45.85 L3.2@109.575,44.525 ; C23.1@109.5,48.05 110.004,48.05 110.627,48.673 U1.9@111.248,48.673
NetIN-5_7: IN-5.7 R9.1 | length 8.9
  Bottom Layer w0.6: IN-5.7@72.467,23.483 74.558,23.483 78.55,27.475 78.55,28.625
NetL1_2: L1.2 U5.3 U5.6 VD1.1 | length 39.3
  Top Layer w1: U5.6@41.822,43.597 41.822,56.024 42.407,56.609 45.641,56.609 U5.3@46.624,55.626 ; U5.6@46.633,44.574 U5.6@49.098,42.109
  Top Layer w1.4: U5.6@51.398,47.162 52.812,47.162 56.409,50.759 58.156,50.759 VD1.1@58.156,50.829
  Top Layer w2: L1.2 38.772,41.284 39.122,41.634 40.834,41.634 42.309,43.109 45.139,43.109 U5.6
NetR3_1: R3.1 U4.7 | length 9.4
  Top Layer w0.5: U4.7 17.11,38.718 17.403,38.425 22.382,38.425 22.675,38.718 R3.1@22.675,40.775
NetR5_2: R5.2 R6.1 U4.5 | length 4.4
  Top Layer w0.5: R5.2@12.7,37.775 R6.1@14.591,37.775 ; R6.1@14.57,37.797 U4.5
NetR7_1: R7.1 R8.1 U5.5 | length 17.1
  Top Layer w0.7: U5.5 43.205,51.576 44.706,50.075 49.975,50.075 52.658,52.758 52.658,53.758 R8.1@52.7,53.8 ; R8.1 R7.1
NetR10_2: R10.2 U1.44 | length 1.9
  Top Layer w0.254: R10.2@113.825,55.254 113.825,54.675 113.95,54.55 U1.44
NetR12_1: R12.1 U1.20 | length 2.6
  Top Layer w0.254: 113.421,45.046 114,45.625 115.05,45.625 115.45,46.025 U1.20@115.45,46.152
NRST: C22.1 U1.7 | length 7.4
  Top Layer w0.254: C22.1@108.25,53.775 109.106,53.775 109.256,53.625 v1(109.35,53.625) ; v1(110.288,49.193) 110.291,49.193 110.771,49.673 111.248,49.673 U1.7
  Bottom Layer w0.254: v1(109.35,53.625) 109.353,53.622 109.803,53.622 110.288,53.137 v1(110.288,49.193)
S1: U1.39 U2.4 | length 118.7
  Top Layer w0.254: U2.4@75.835,7.54 75.835,4.69 77.914,2.611 124.881,2.611 132.325,10.055 132.325,40.516 120.622,52.22 120.622,53.322 118.335,55.609 116.599,55.609 116.45,55.461 U1.39
S2: U1.40 U2.3 | length 123.7
  Top Layer w0.254: U2.3@73.295,7.54 73.295,4.705 75.823,2.177 125.061,2.177 132.8,9.916 132.8,40.655 121.056,52.399 121.056,53.575 118.472,56.159 116.535,56.159 115.95,55.574 U1.40
S3: U1.41 U2.2 | length 128.7
  Top Layer w0.254: U2.2@70.755,7.54 70.755,4.695 73.707,1.743 125.24,1.743 133.275,9.778 133.275,40.794 121.49,52.579 121.49,53.801 118.697,56.593 116.355,56.593 115.45,55.688 U1.41
S4: U1.42 U2.1 | length 133.6
  Top Layer w0.254: U2.1@68.225,7.525 68.225,4.7 71.616,1.309 125.42,1.309 133.735,9.624 133.735,40.947 121.924,52.759 121.924,53.981 118.869,57.035 116.183,57.035 115.068,55.92 114.996,55.848 114.994,55.746 U1.42
SET1: IN-1.2 U2.18 | length 57.2
  Top Layer w0.5: IN-1.2@14.325,23.05 17.281,23.05 18.631,21.7 37.756,21.7 44.456,15 U2.18
SET2: IN-2.2 IN-5.9 U2.17 | length 41.2
  Top Layer w0.5: IN-2.2@41.625,23.1 41.65,23.125 47.456,23.125 53.456,17.125 68.63,17.125 U2.17 70.755,19.345 IN-5.9@67.711,22.389
SET3: IN-3.2 U2.16 | length 20
  Top Layer w0.5: v1(85.35,17.35) 86.928,18.928 86.928,22.428 IN-3.2@87.775,23.275
  Bottom Layer w0.6: U2.16 74.82,16.525 84.525,16.525 v1(85.35,17.35)
SET4: IN-4.2 U2.15 | length 56
  Top Layer w0.6: U2.15 77.385,13.45 96.525,13.45 v1(96.55,13.475)
  Bottom Layer w0.6: v1(96.55,13.475) 96.55,13.525 100.575,17.55 119.375,17.55 119.975,18.15 119.975,21.197 117.822,23.35 IN-4.2@114.632,23.35
SWCLK: U1.37 XP2.2 | length 20
  Top Layer w0.254: U1.37@117.447,53.434 117.447,54.509 v1(117.922,54.984)
  Bottom Layer w0.254: 111.375,58.525 117.675,58.525 117.922,58.278 v1(117.922,54.984)
  Bottom Layer w0.3: XP2.2@105.797,57.759 105.797,56.334 106.222,55.909 108.797,55.909 111.387,58.5
SWDIO: U1.34 XP2.3 | length 30.2
  Top Layer w0.254: U1.34 119.258,51.675 119.599,51.334 v1(120.547,51.334)
  Bottom Layer w0.3: XP2.3@103.297,57.809 104.547,59.059 119.347,59.059 120.647,57.759 122.521,57.759 122.697,57.584 122.697,55.909 120.522,53.734 v1@120.522,51.384
VBAT: C18.2 U1.1 VD3.3 | length 7.1
  Top Layer w0.254: VD3.3@105.575,49.75 105.575,49.8 105.748,49.973 107.698,49.973 108.133,50.408 108.133,50.792 108.33,50.989 108.733,50.989 110.419,52.675 U1.1
pads on no net: BT1.1 IN-1.4 IN-2.4 IN-3.4 IN-4.4 IN-5.1 IN-5.2 IN-5.4 IN-5.11 SW1.2 SW1.4 U1.2 U1.10 U1.11 U1.13 U1.14 U1.15 U1.16 U1.17 U1.18 U1.19 U1.21 U1.33 U1.38 U1.43 U1.45 U1.46 U2.5 U2.6 U2.7 U2.8 U2.11 U2.12 U2.13 U2.14 VD3.2 XP1. XP1.A5 XP1.A6 XP1.A7 XP1.A8 XP1.B5 XP1.B6 XP1.B7 XP1.B8
copper on no net: | length 14.4
  Top Layer w0.5: 91.938,47.625 94.099,47.625 98.124,51.65 104.575,51.65 104.625,51.7 104.625,51.75
  other v2: 112.5,47.725 113.6,47.725 114.7,47.725 115.8,47.725 116.9,47.725 112.5,48.825 113.6,48.825 114.7,48.825 115.8,48.825 116.9,48.825 112.5,49.925 113.6,49.925 114.7,49.925 115.8,49.925 116.9,49.925 112.5,51.025 113.6,51.025 114.7,51.025 115.8,51.025 116.9,51.025 112.5,52.125 113.6,52.125 114.7,52.125 115.8,52.125 116.9,52.125
  other v3: 3.222,3.259 133.9,3.259 3.147,56.459 134.422,56.459

## Polygon pours and split planes (outlines as drawn)
GND on Bottom Layer "Bottom Layer-GND" (solid, pour order 12): 25.775,35.725 137.125,35.725 137.125,36.124 137.4,36.124 137.4,48.97 126.77,59.6 20.35,59.375 20.35,56.85 26.225,50.975 25.975,50.725 25.975,48.025 0.033,48.025 0.003,48.055 0.003,35.698 25.748,35.698
5V on Top Layer "5V_L01_P008" (solid, pour order 8): 24.575,50.325 24.575,46.275 24.575,41.825 24.575,37.45 29.7,37.45 39.025,46.775 39.025,56.299 37.781,56.299 34.459,52.404 24.55,52.375 24.575,52.35

## Keep-outs
Keep-Out Layer:
  lines w0.2: 0,56.325 cw(c3.282,56.318) 3.282,59.6 ; 0.003,3.35 0.003,56.5 ; 0.012,3.35 ccw(c3.35,3.35) 3.362,0.012 ; 3.25,59.6 134.125,59.6 cw(c134.118,56.318) 137.4,56.318 ; 3.375,0 134.2,-0.019 ; 134.118,-0.025 ccw(c134.118,3.257) 137.4,3.25 ; 137.4,3.2 137.4,56.325

## Other copper
Top Layer:
  region net GND: 24.247,53.082 24.247,58.037 24.572,58.362 25.647,58.362 25.947,58.062 25.947,53.082
Bottom Layer:
  pour cut-out: -0.029,5.922 cw(c2.991,3.002) 5.911,-0.018 5.891,0.002 -0.009,0.002

## Silkscreen, mask and mechanical layers (free items; w line width, h text height)
Top Overlay:
  lines w0.127: 41.453,40.024 51.813,40.024 ; 41.453,49.174 41.453,50.779 51.813,50.779 51.813,49.174
  text "SCK" at 104.622,55.424 h1.32
  text "GND" at 107.322,55.424 h1.32
  text "DIO" at 102.272,55.399 h1.32
  text "3.3V" at 99.7,55.39 h1.32
  text "Github.com/Nozyl/IV-11_clock" at 8.454,6.862 h1.52
Bottom Overlay:
  circle w0.01: c68.959,27.336 r7.096
Top Paste:
  region: 41.703,40.764 41.703,42.024 43.123,42.024 43.123,40.764
  region: 41.703,42.884 41.703,44.144 43.123,44.144 43.123,42.884
  region: 41.703,45.004 41.703,46.264 43.123,46.264 43.123,45.004
  region: 43.813,40.764 43.813,42.024 45.233,42.024 45.233,40.764
  region: 43.813,42.884 43.813,44.144 45.233,44.144 45.233,42.884
  region: 45.923,40.764 45.923,42.024 47.343,42.024 47.343,40.764
  region: 45.923,42.884 45.923,44.144 47.343,44.144 47.343,42.884
  region: 45.923,45.004 45.923,46.264 47.343,46.264 47.343,45.004
  region: 48.033,40.764 48.033,42.024 49.453,42.024 49.453,40.764
  region: 48.033,42.884 48.033,44.144 49.453,44.144 49.453,42.884
  region: 50.143,40.764 50.143,42.024 51.563,42.024 51.563,40.764
  region: 50.143,42.884 50.143,44.144 51.563,44.144 51.563,42.884
  region: 50.143,45.004 50.143,46.264 51.563,46.264 51.563,45.004
  region: 50.143,47.124 50.143,48.384 51.563,48.384 51.563,47.124
  region: 41.703,47.124 41.703,48.384 43.123,48.384 43.123,47.124
  region: 43.813,45.004 43.813,46.264 45.233,46.264 45.233,45.004
  region: 43.813,47.124 43.813,48.384 45.233,48.384 45.233,47.124
  region: 45.923,47.124 45.923,48.384 47.343,48.384 47.343,47.124
  region: 48.033,45.004 48.033,46.264 49.453,46.264 49.453,45.004
  region: 48.033,47.124 48.033,48.384 49.453,48.384 49.453,47.124
Top 3D Body:
  circle w0.2: c38.342,42.001 r0.1
  lines w0.127: 3.621,41.61 8.621,41.61 ; 41.453,41.879 41.453,50.779 51.813,50.779 51.813,41.879 41.453,41.879
Top Courtyard:
  lines w0.05: 3.661,39.9 3.661,41.36 3.371,41.36 3.371,45.86 3.661,45.86 3.661,47.32 8.581,47.32 8.581,45.86 8.871,45.86 8.871,41.36 8.581,41.36 8.581,39.9 ; 20.575,41.836 20.575,46.756 ; 36.322,47.341 36.322,58.281 ; 42.403,56.039 50.763,56.039 ; 42.453,56.064 42.453,51.034 41.113,51.034 41.113,40.094 52.153,40.094 ; 50.813,56.064 50.813,51.034 52.153,51.034 ; 76.7,21.748 77.4,21.748 ; 79.1,21.748 79.8,21.748